# Altium PCB BUMPER PCB.PCBDOC
Units mil, origin at the board's own origin, x right, y up, seen from the top; angles counter-clockwise.
Board outline 11800 x 7870 mil, 2 copper layers (Top Layer, Bottom Layer); 3 components, 2 nets, 12 pads, 0 vias.
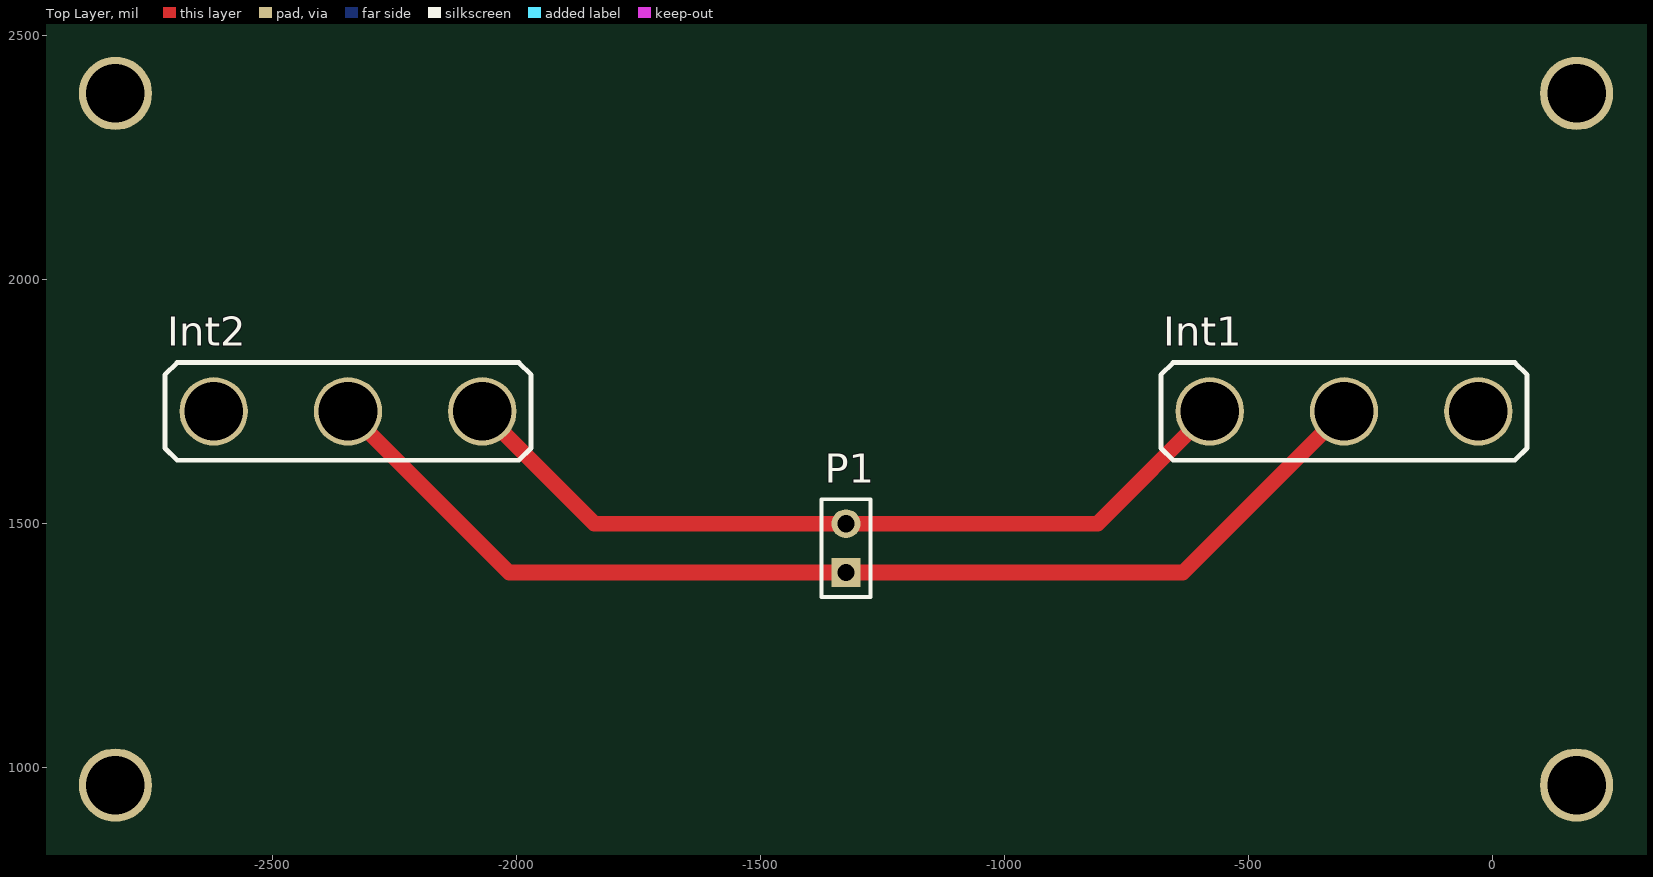
[diagram p0: Top Layer view]
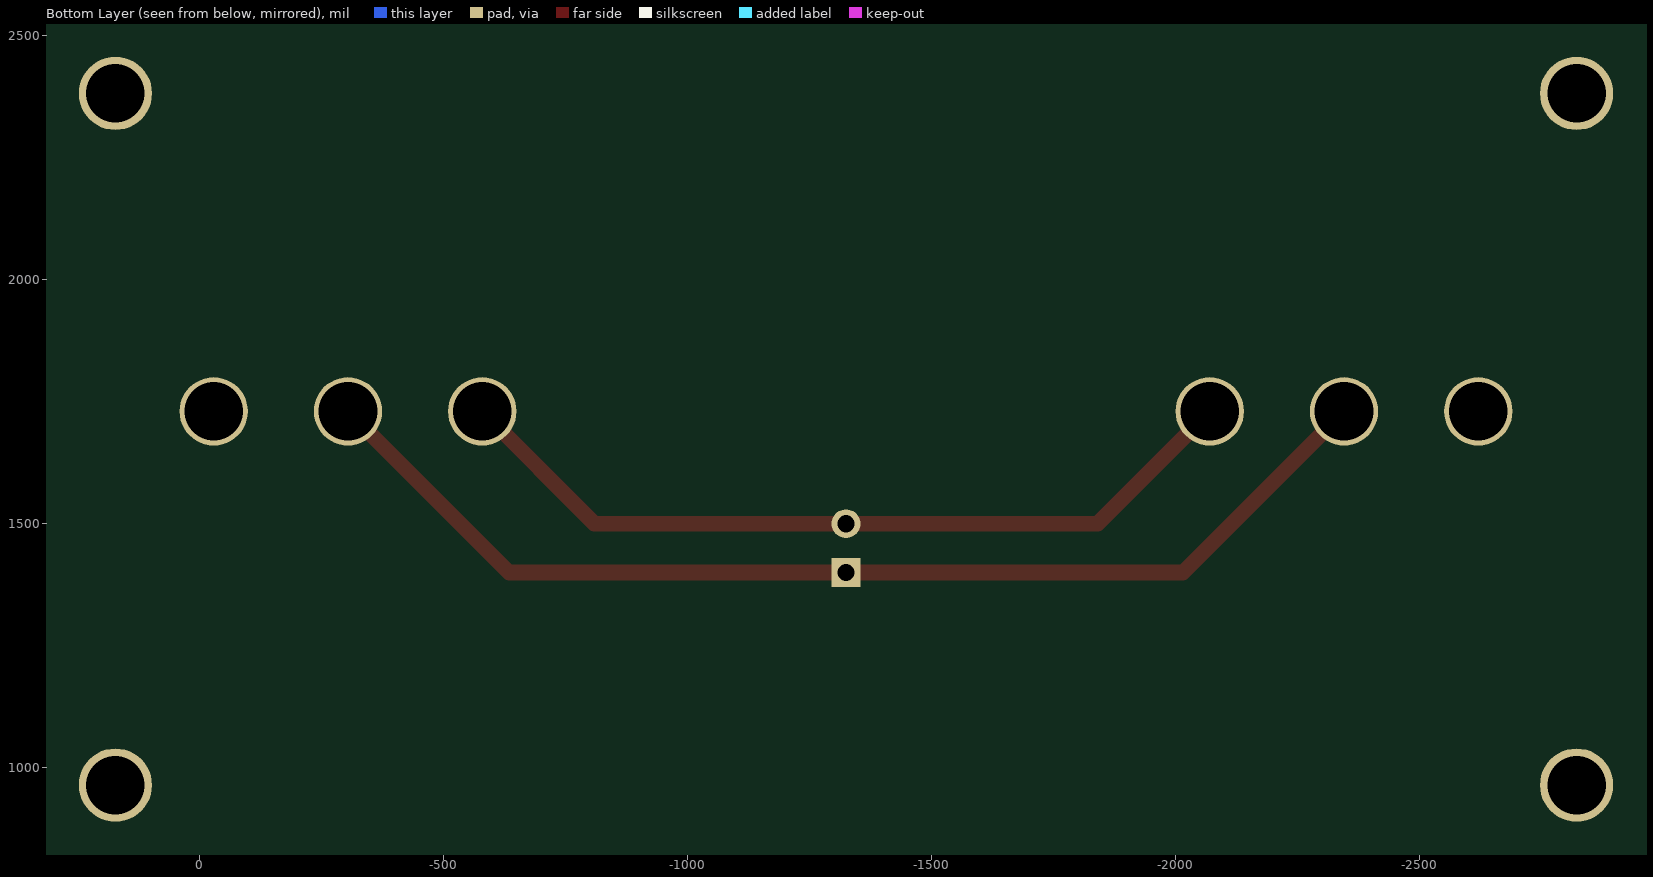
[diagram p1: Bottom Layer view, seen from below]

## Layer stack, top to bottom
Top Solder: solder mask 0.4, Solder Resist, Dk 3.5
Top Layer: signal copper 1.4
Dielectric1: dielectric 12.6, FR-4, Dk 4.8
Bottom Layer: signal copper 1.4
Bottom Solder: solder mask 0.4, Solder Resist, Dk 3.5

## Board outline
-5576.97,-1826.38 6223.03,-1826.38 6223.03,6043.62 -5576.97,6043.62

## Design rules (kind name [scope] priority, off if disabled: settings)
Clearance Clearance_bottom_polygon [OnLayer('Bottom Layer') Or OnLayer('Multi-Layer') vs OnLayer('Bottom Layer')  And  InPoly] p1: gap=20 ignorepadtopadclearanceinfootprint=FALSE except(0: Arc-Hole Track-Hole SMDPad-Hole THPad-Hole Via-Hole Fill-Hole Poly-Hole Region-Hole Text-Hole)
Clearance Clearance_bottom_polygon_keepout [OnLayer('Bottom Layer') Or OnLayer('Multi-Layer') Or InPoly vs OnLayer('Keepout')] p2: gap=0 ignorepadtopadclearanceinfootprint=FALSE
Clearance Clearance_top_polygon [OnLayer('Top Layer')  Or OnLayer('Multi-Layer') vs OnLayer('Top Layer') And InPoly] p3: gap=20 ignorepadtopadclearanceinfootprint=FALSE except(0: Arc-Hole Track-Hole SMDPad-Hole THPad-Hole Via-Hole Fill-Hole Poly-Hole Region-Hole Text-Hole)
Clearance Clearance_bottom [OnLayer('Bottom Layer') Or OnLayer('Multi-Layer') vs OnLayer('Bottom Layer')  And Not InPoly] p4: gap=8 ignorepadtopadclearanceinfootprint=FALSE except(0: Arc-Hole Track-Hole SMDPad-Hole THPad-Hole Via-Hole Fill-Hole Poly-Hole Region-Hole Text-Hole)
Clearance Clearance_top [OnLayer('Top Layer')  Or OnLayer('Multi-Layer') vs OnLayer('Top Layer') And Not InPoly] p5: gap=8 ignorepadtopadclearanceinfootprint=FALSE except(0: Arc-Hole Track-Hole SMDPad-Hole THPad-Hole Via-Hole Fill-Hole Poly-Hole Region-Hole Text-Hole)
Clearance Clearance_pad_to_pad [OnLayer('Multi-Layer') vs OnLayer('Multi-Layer')] p6: gap=10 ignorepadtopadclearanceinfootprint=FALSE except(0: Arc-Hole Track-Hole SMDPad-Hole THPad-Hole Via-Hole Fill-Hole Poly-Hole Region-Hole Text-Hole)
ComponentClearance ComponentClearance_bottom [OnLayer('Bottom Overlay') vs OnLayer('Bottom Overlay')] p1: gap=0 collisioncheckmode=3 verticalgap=10 showdistances=FALSE
ComponentClearance ComponentClearance_top [OnLayer('Top Overlay') vs OnLayer('Top Overlay')] p2: gap=0 collisioncheckmode=3 verticalgap=10 showdistances=FALSE
FabricationTestPointUsage TestPointUsage [All] p1: valid=0 allowmultiple=FALSE
FabricationTestpoint Testpoint [All] p1: side=3 testpointundercomponent=TRUE minsize=40 maxsize=100 preferedsize=60 minholesize=0 maxholesize=40 preferedholesize=32 testpointgrid=1 allowsidetop=TRUE allowsidebottom=TRUE usegrid=TRUE gridtolerance=0.01
HoleSize [All] p1: absolutevalues=TRUE maxlimit=1000 minlimit=16 maxpercent=80.000 minpercent=20.000
MinimumAnnularRing [PadXSize_AllLayers = PadYSize_AllLayers] p1: minimumring=10
PermittedLayers [All] p1: toplayerpermitted=TRUE bottomlayerpermitted=TRUE
PolygonConnect [All] p1: connectstyle=Relief reliefconductorwidth=24 reliefentries=4 polygonreliefangle="90 Angle" airgapwidth=10
RoomDefinition "SCHEMA ELEC BUMPERS" [InComponentClass('SCHEMA ELEC BUMPERS')] p1: confinementstyle=ConfineIn formatcopy=TRUE lockcomponents=FALSE outline -7576.97,-4826.38 -5576.97,-4826.38 -5576.97,-3826.38 -7576.97,-3826.38
RoutingVias [All] p1: holewidth=16 width=50 viastyle="Through Hole" minholewidth=16 minwidth=36 maxholewidth=1000 maxwidth=1000
SMDToPlane [All] p1: distance=0
SolderMaskExpansion [All] p1: expansion=4 istentingtop=FALSE
ViasUnderSMD [All] p1: allowed=FALSE
Width Width_botom_top [OnLayer('Bottom Layer') or OnLayer('Top Layer')] p1: maxlimit=10000 minlimit=10 preferedwidth=32
26 further rules are at their usual default settings.

## Components (designator, comment, footprint, x,y, rotation, side; value= is the part's Value field where it differs from the comment)
Int1 "DB2C-A1RC" PCBComponent_1 -305,1730 r270 top
Int2 "DB2C-A1RC" PCBComponent_1 -2345,1730 r90 top
P1 "Header 2" HDR1X2 -1325,1400 r90 top

## Footprints (in the part's own frame and the unit in brackets; to place one, negate y for a bottom-side part, rotate by r counter-clockwise, add the part's x,y. Pads: shape width x height; smd on the part's side, far side on the other; paste and mask are expansions set on the pad)
HDR1X2 [mm] "Connector; Header; 2 Position"
  rect 1.5x1.5 hole 0.9: 1(0,0)
  round 1.5 hole 0.9: 2(2.54,0)
  silkscreen extent -1.27,-1.27 3.81,1.27
PCBComponent_1 [mil]
  round 140 hole 120: 0(0,-275) 1(0,0) 2(0,275)
  silkscreen extent -100,-375 100,375

## Part data
Int1 Int2: "Microrupteur à galet"
P1: "Header, 2-Pin", LatestRevisionDate=17-Jul-2002, LatestRevisionNote="Re-released for DXP Platform.", Publisher="Altium Limited"

## Free pads (board coordinates)
  round 150 hole 120: ""(-2821.3,964.7) ""(-2821.3,2381.3) ""(171.3,964.7) ""(171.3,2381.3)

## Nets (pads, with @x,y where several pads share a name; then routed paths per layer and width w, separated by ;. In a path a pad name is that pad's centre, name@x,y a point inside that pad or via, vN(x,y) a via of type N, cw(c..) or ccw(c..) an arc to the next point about the centre after c; other vN are vias at no path point)
GND: Int1.0 Int2.0 P1.2 | length 1685.4
  Top Layer w32: Int2.0 -1840,1500 P1.2 -810,1500 -582.42,1727.58 -582.42,1732.42 Int1.0
NO: Int1.1 Int2.1 P1.1 | length 2318.2
  Top Layer w32: Int2.1 -2015,1400 P1.1 -635,1400 -307.42,1727.58 -307.42,1732.42 Int1.1
pads on no net: Int1.2 Int2.2

## Keep-outs
Keep-Out Layer:
  rectangle: -5539.17,-1819.28 -5342.32,6054.73
  rectangle: -5342.32,-1819.28 6075,-1622.43
  rectangle: 5878.15,-1622.43 6075,6054.73
  rectangle: -5342.32,5857.88 5878.15,6054.73

## Other copper
Top Layer:
  region: 140,2360

## Silkscreen, mask and mechanical layers (free items; w line width, h text height)
Mechanical 1:
  lines w10: -2900,886 -2664,886 -2250,1300 -400,1300 14,886 250,886 250,2460 -2900,2460 -2900,2310 -2900,886
Mechanical 32:
  text "Les bandes en violet delimitent la surface utilisable...." at -5030,6634 h200
  text "Mais vous n'etes pas obliges de tout utiliser!!" at -4330,6218 h200
  text "ATTENTION:" at 6521,5481 h200
  text "Par defaut, les pistes" at 6521,5071 h200
  text "ont 32mil de largeur" at 6516,4693 h200
  text "En cas de besoin, cette largeur" at 6527,4331 h200
  text "peut etre reduite jusqu'a 10 mil" at 6516,3923 h200
  text "Par defaut, les vias" at 6544,3224 h200
  text "ont un diam. de 50 mil" at 6538,2824 h200
  text "En cas de besoin, ce diam." at 6504,2348 h200
  text "peut etre reduit jusqu'a 36 mil" at 6528,1918 h200